# EAGLE board ACmaster (EAGLE 6.4)
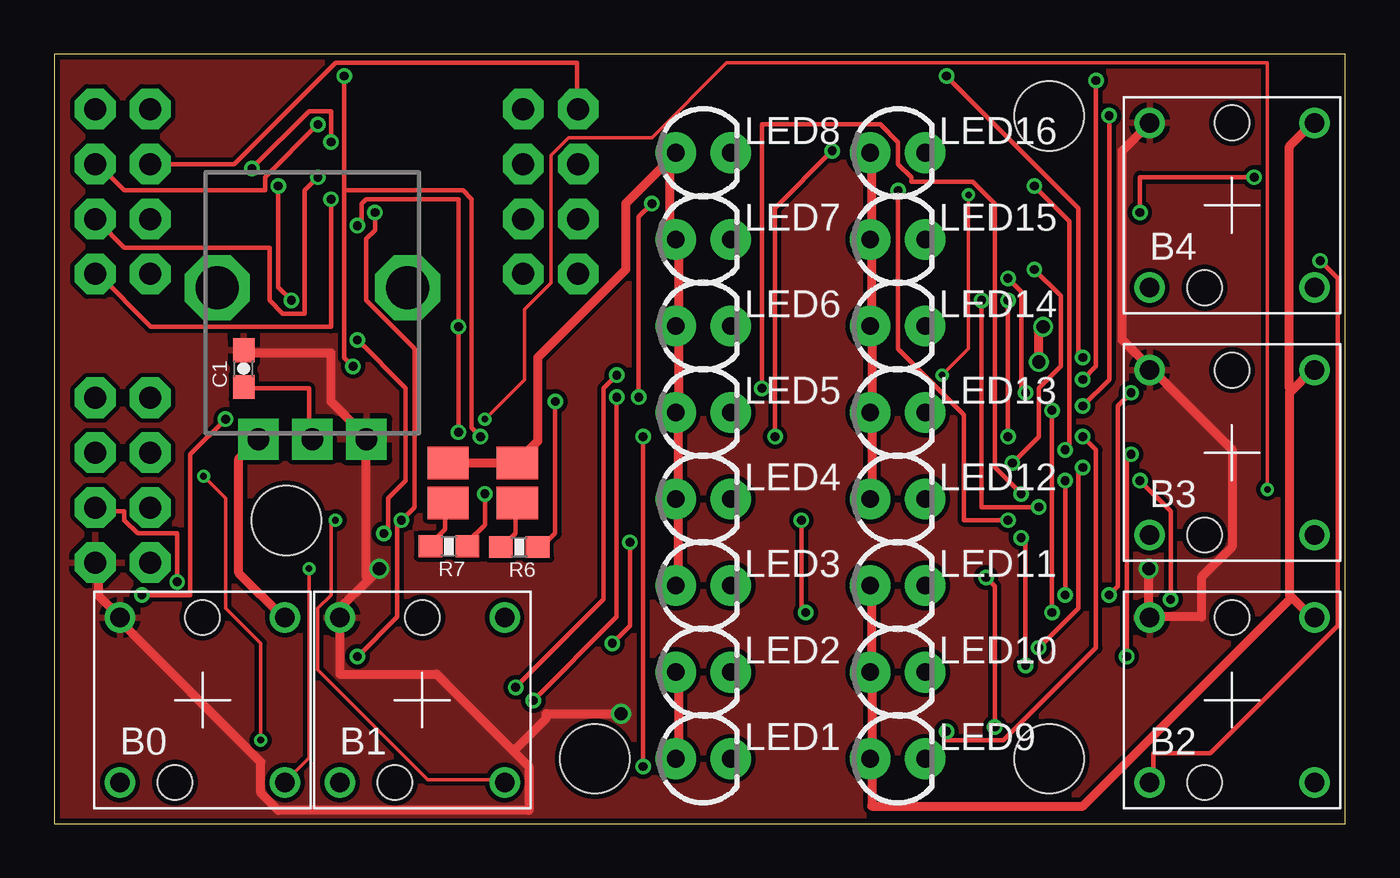
[diagram p0: board, top side]
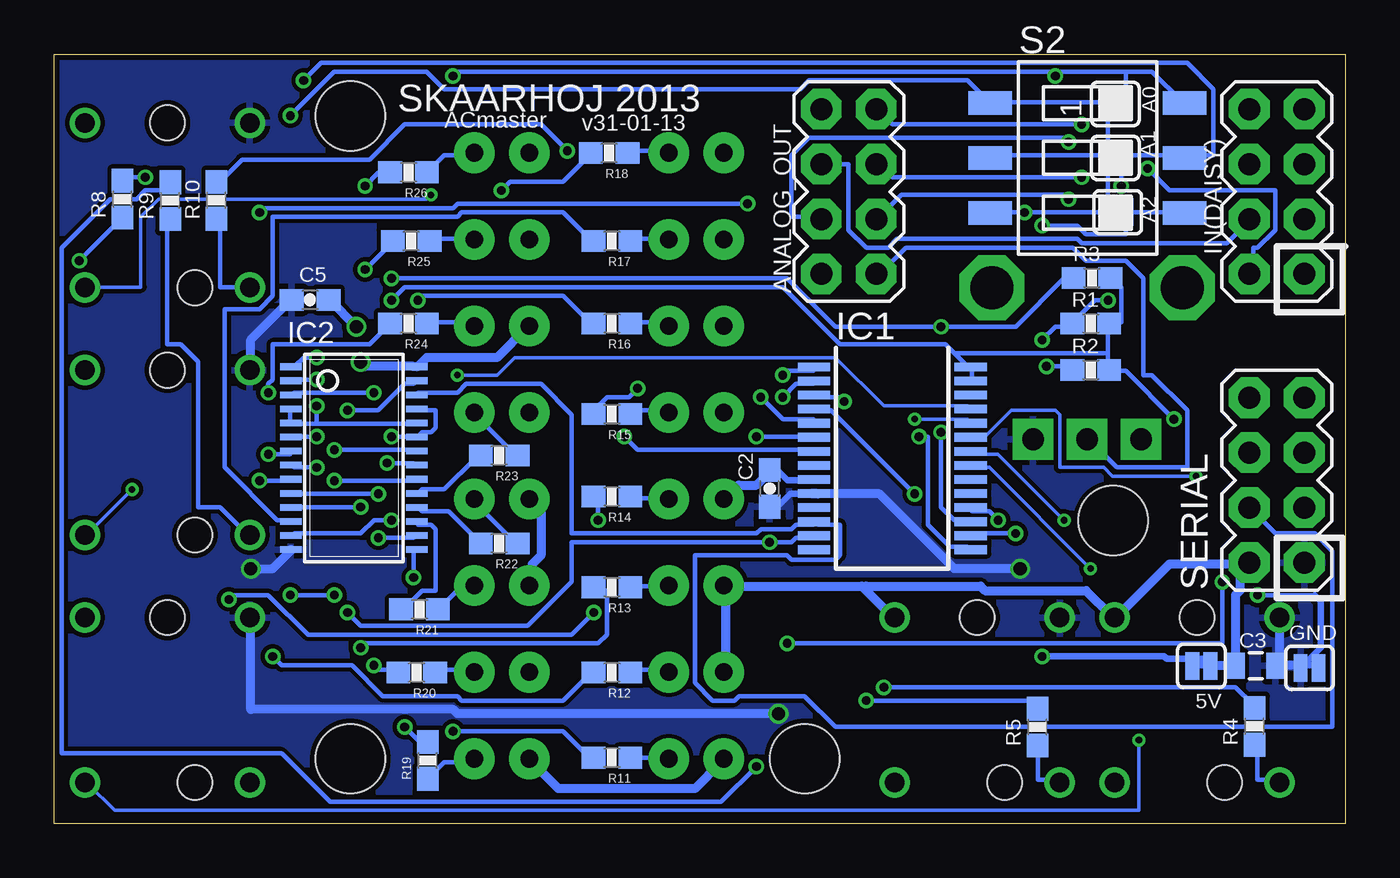
[diagram p1: board, bottom side, seen from below]

Size 59.69 x 35.56 mm. Coordinates in mm from the lower left corner, seen from the top.
Outline: 0,0 59.69,0 59.69,35.56 0,35.56 0,0
Copper layers (1*16): Top 0.035mm / dielectric 1.5mm / Bottom 0.035mm
Design rules "Fusion_eagle_rule_v1.1": minimum track width 6mil, minimum drill 12mil, track to track 6mil, track to pad 6mil, pad to pad 6mil, via to via 6mil, smd to smd 0mil, copper to edge 10mil, drill to drill 10mil, minimum pad ring 10mil, minimum via ring 6mil, stop-mask expansion 2mil, vias tented up to drill 100mil, thermal gap 10mil
Net classes: 0 default: width 0.203 mm, drill 0.406 mm, clearance 0.152 mm; 1 Power: width 0.406 mm, drill 0.61 mm, clearance 0.203 mm; 2 Signal: width 0.152 mm, clearance 0.152 mm
Holes 3.2 mm at 10.73,14 25,3 46,32.7 46,3

## Footprints (pad centres in the part's own frame; a part is rotated, then mirrored left to right if it is on the bottom)
SJ_2S = smd 0.635 x 1.27: 1 -0.412,0; 2 0.412,0
2X4 = drill 1.016 pad 1.88 octagon: 1 -3.81,-1.27; 2 -3.81,1.27; 3 -1.27,-1.27; 4 -1.27,1.27; 5 1.27,-1.27; 6 1.27,1.27; 7 3.81,-1.27; 8 3.81,1.27
CFPB-6/9MM = drill 0.9: P$1 -3.81,3.81; P$2 3.81,-3.81; P$3 3.81,3.81; P$4 -3.81,-3.81 | hole 1.6: 0,3.81; -1.27,-3.81
0603-CAP = smd 1.1 x 1: 1 -0.85,0; 2 0.85,0
0805 = smd 0.8 x 1.2: 1 -0.9,0; 2 0.9,0
SSOP28 = smd 0.4 x 1.5: 1 -4.225,-3.625; 2 -3.575,-3.625; 3 -2.925,-3.625; 4 -2.275,-3.625; 5 -1.625,-3.625; 6 -0.975,-3.625; 7 -0.325,-3.625; 8 0.325,-3.625; 9 0.975,-3.625; 10 1.625,-3.625; 11 2.275,-3.625; 12 2.925,-3.625; 13 3.575,-3.625; 14 4.225,-3.625; 15 4.225,3.625; 16 3.575,3.625; 17 2.925,3.625; 18 2.275,3.625; 19 1.625,3.625; 20 0.975,3.625; 21 0.325,3.625; 22 -0.325,3.625; 23 -0.975,3.625; 24 -1.625,3.625; 25 -2.275,3.625; 26 -2.925,3.625; 27 -3.575,3.625; 28 -4.225,3.625
TSSOP28 = smd 0.305 x 0.991: 1 -4.225,-2.918; 2 -3.575,-2.918; 3 -2.925,-2.918; 4 -2.275,-2.918; 5 -1.625,-2.918; 6 -0.975,-2.918; 7 -0.325,-2.918; 8 0.325,-2.918; 9 0.975,-2.918; 10 1.625,-2.918; 11 2.275,-2.918; 12 2.925,-2.918; 13 3.575,-2.918; 14 4.225,-2.918; 15 4.225,2.918; 16 3.575,2.918; 17 2.925,2.918; 18 2.275,2.918; 19 1.625,2.918; 20 0.975,2.918; 21 0.325,2.918; 22 -0.325,2.918; 23 -0.975,2.918; 24 -1.625,2.918; 25 -2.275,2.918; 26 -2.925,2.918; 27 -3.575,2.918; 28 -4.225,2.918
LED3MM = drill 0.813 pad 1.88: A -1.27,0; K 1.27,0
0603-RES = smd 1.1 x 1: 1 -0.85,0; 2 0.85,0
SMS-003 = smd 1.092 x 2.007: 1 -2.54,-4.496; 2 0,-4.496; 3 2.54,-4.496; 4 2.54,4.496; 5 0,4.496; 6 -2.54,4.496
ALPS_POT = drill 1 pad 1.88 square: P$1 7,-2.5; P$2 7,0; P$3 7,2.5 | drill 2 octagon: P$4 0,-4.4; P$5 0,4.4
LEDBICOLOR-SMD = smd 1.9 x 1.5: P$1 1.6,0.925; P$2 -1.6,0.925; P$3 1.6,-0.925; P$4 -1.6,-0.925

## Placement (x,y rotation side)
5V  SOLDERJUMPERNC  [SJ_2S]  6.66,7.29 180 bottom
A0  SOLDERJUMPERNC  [SJ_2S]  10.63,33.25 0 bottom
A1  SOLDERJUMPERNC  [SJ_2S]  10.63,30.76 0 bottom
A2  SOLDERJUMPERNC  [SJ_2S]  10.52,28.25 0 bottom
ANALOG_OUT  M04X2  [2X4]  22.95,29.21 90 bottom
B0  CFPB  [CFPB-6/9MM]  6.86,5.71 0 top
B1  CFPB  [CFPB-6/9MM]  17.02,5.71 0 top
B2  CFPB  [CFPB-6/9MM]  54.45,5.71 0 top
B3  CFPB  [CFPB-6/9MM]  54.45,17.14 0 top
B4  CFPB  [CFPB-6/9MM]  54.45,28.57 0 top
C1  10nF  [0603-CAP]  8.77,21.03 90 top
C2  100nF  [0603-CAP]  26.61,15.49 90 bottom
C3  10uF  [0805]  4.15,7.29 0 bottom
C5  100nF  [0603-CAP]  47.85,24.2 180 bottom
GND  SOLDERJUMPERNC  [SJ_2S]  1.66,7.2 0 bottom
IC1  MCP23017SS  [SSOP28]  20.94,16.88 270 bottom
IC2  PCA9685  [TSSOP28]  45.83,16.89 270 bottom
IN(DAISY)  M04X2  [2X4]  3.17,29.21 90 bottom
LED1  [LED3MM]  30,3 0 top
LED2  [LED3MM]  30,7 0 top
LED3  [LED3MM]  30,11 0 top
LED4  [LED3MM]  30,15 0 top
LED5  [LED3MM]  30,19 0 top
LED6  [LED3MM]  30,23 0 top
LED7  [LED3MM]  30,27 0 top
LED8  [LED3MM]  30,31 0 top
LED9  [LED3MM]  39,3 0 top
LED10  [LED3MM]  39,7 0 top
LED11  [LED3MM]  39,11 0 top
LED12  [LED3MM]  39,15 0 top
LED13  [LED3MM]  39,19 0 top
LED14  [LED3MM]  39,23 0 top
LED15  [LED3MM]  39,27 0 top
LED16  [LED3MM]  39,31 0 top
R1  10K  [0603-RES]  11.78,23.1 0 bottom
R2  10K  [0603-RES]  11.78,20.96 0 bottom
R3  10K  [0603-RES]  11.71,25.21 0 bottom
R4  [0603-RES]  4.2,4.5 90 bottom
R5  [0603-RES]  14.23,4.47 90 bottom
R6  [0603-RES]  21.5,12.79 0 top
R7  [0603-RES]  18.25,12.82 0 top
R8  [0603-RES]  56.52,28.86 90 bottom
R9  [0603-RES]  54.31,28.79 90 bottom
R10  [0603-RES]  52.18,28.8 90 bottom
R11  [0603-RES]  33.91,3.05 180 bottom
R12  [0603-RES]  33.91,6.99 180 bottom
R13  [0603-RES]  33.91,10.92 180 bottom
R14  [0603-RES]  33.91,15.11 180 bottom
R15  [0603-RES]  33.91,18.92 180 bottom
R16  [0603-RES]  33.91,23.11 180 bottom
R17  [0603-RES]  33.91,26.92 180 bottom
R18  [0603-RES]  34.04,30.99 180 bottom
R19  [0603-RES]  42.42,2.92 90 bottom
R20  [0603-RES]  42.93,6.99 180 bottom
R21  [0603-RES]  42.8,9.91 180 bottom
R22  [0603-RES]  39.12,12.95 180 bottom
R23  [0603-RES]  39.12,17.02 180 bottom
R24  [0603-RES]  43.31,23.11 180 bottom
R25  [0603-RES]  43.18,26.92 180 bottom
R26  [0603-RES]  43.31,30.1 180 bottom
S2  SWS003  [SMS-003]  11.93,30.76 270 bottom
SERIAL  M04X2  [2X4]  3.17,15.88 90 bottom
U$2  [ALPS_POT]  11.94,24.77 270 top
U$6  LEDBICOLOR-SMD  [LEDBICOLOR-SMD]  19.81,15.75 0 top

## Library data of the parts
5V A0 A1 A2 ANALOG_OUT C1-C3 C5 GND IN(DAISY) LED1-LED16 R1-R26 SERIAL U$2 = SparkFun
B0 B1-B4 U$6 = SKAARHOJ
IC1 = microchip; MF: MICROCHIP; MPN: MCP23017-E/SS; OC_FARNELL: 1467674; OC_NEWARK: 31K2960
IC2 = wsmith
S2 = smd-special

## Nets
5V [Power]: 5V.1 B0.P$3 B1.P$3 B2.P$3 B3.P$3 B4.P$3 C2.2 C3.1 C5.1 IC1.9 IC2.28 LED1.A LED2.A LED3.A LED4.A LED5.A LED6.A LED7.A LED8.A LED9.A LED10.A LED11.A LED12.A LED13.A LED14.A LED15.A LED16.A SERIAL.2 U$2.P$1 U$6.P$1 U$6.P$2
5VL: 5V.2 A0.1 A1.1 A2.1 IC1.18 IC2.4 IC2.5 IC2.24 S2.1 S2.2 S2.3
A0: A0.2 IC1.15 IC2.1 R2.1 S2.6
A1: A1.2 IC1.16 IC2.2 R1.1 S2.5
A2: A2.2 IC1.17 IC2.3 R3.1 S2.4
ANALOG1: ANALOG_OUT.1 C1.1 U$2.P$2
ANALOG2: ANALOG_OUT.2
GND [Power]: B0.P$1 B1.P$1 B2.P$1 B3.P$1 B4.P$1 C1.2 C2.1 C3.2 C5.2 GND.1 IC1.10 IC2.14 SERIAL.1 U$2.P$3
GNDL: GND.2 IC1.27 IC1.28 IC2.23 IC2.25 R1.2 R2.2 R3.2
GPA0 [Signal]: B0.P$2 IC1.21
GPA1 [Signal]: B1.P$2 IC1.22
GPA2 [Signal]: B2.P$2 IC1.23
GPA3 [Signal]: B3.P$2 IC1.24
GPA4 [Signal]: B4.P$2 IC1.25
GPA5 [Signal]: IC1.26
I2C_SCL: IC1.12 IC2.26 SERIAL.4
I2C_SDA: IC1.13 IC2.27 SERIAL.3
L0: LED1.K R11.1
L1: LED2.K R12.1
L2: LED3.K R13.1
L3: LED4.K R14.1
L4: LED5.K R15.1
L5: LED6.K R16.1
L6: LED7.K R17.1
L7: LED8.K R18.1
L8: LED9.K R19.1
L9: LED10.K R20.1
L10: LED11.K R21.1
L11: LED12.K R22.1
L12: LED13.K R23.1
L13: LED14.K R24.1
L14: LED15.K R25.1
L15: LED16.K R26.1
LC0: B0.P$4 R4.1
LC1: B1.P$4 R5.1
LC2: R6.1 U$6.P$3
LC3: R7.1 U$6.P$4
LC4: B2.P$4 R8.1
LC5: B3.P$4 R9.1
LC6: B4.P$4 R10.1
N$1: IC2.13 R18.2
N$2: IC1.4 R7.2
N$3: IC1.5 R8.2
N$4: IC1.6 R9.2
N$5: IC1.7 R10.2
N$7: IC1.3 R6.2
N$8: IC1.2 R5.2
N$9: IC1.1 R4.2
N$10: ANALOG_OUT.3 IN(DAISY).1
N$11: ANALOG_OUT.5 IN(DAISY).3
N$12: ANALOG_OUT.7 IN(DAISY).5
N$13: ANALOG_OUT.4 IN(DAISY).2
N$14: ANALOG_OUT.6 IN(DAISY).4
N$15: ANALOG_OUT.8 IN(DAISY).6
N$16: IC2.12 R17.2
N$17: IC2.11 R16.2
N$18: IC2.10 R15.2
N$19: IC2.9 R14.2
N$20: IC2.8 R13.2
N$21: IC2.7 R12.2
N$22: IC2.6 R11.2
N$23: IC2.15 R19.2
N$24: IC2.16 R20.2
N$25: IC2.17 R21.2
N$26: IC2.18 R22.2
N$27: IC2.19 R23.2
N$28: IC2.20 R24.2
N$29: IC2.21 R25.2
N$30: IC2.22 R26.2

## Tracks (layer width: path | path; a pad name or v marks a point on that pad's centre or on a via)
5V  (via drill 0.61)
  Top 0.406: 57.2,10.46 57.1,10.57 57.1,19.91 57.2,20.02 | 57.2,10.46 58.12,9.55 B2.P$3 | 57.2,20.02 58.12,20.93 B3.P$3 | B4.P$3 58.12,32.31 57.1,31.29 57.1,20.12 57.2,20.02 | LED11.A 37.8,10.97 37.8,7.11 LED10.A 37.8,6.91 37.8,3.05 LED9.A 37.8,2.85 37.8,0.81 47.55,0.81 57.2,10.46 | LED12.A 37.8,15.04 37.8,18.9 LED13.A 37.8,19.1 37.8,22.96 LED14.A 37.8,23.16 37.8,26.82 LED15.A 37.8,27.03 37.8,30.89 LED16.A | v45.72,22.96 45.52,22.76 v45.52,21.34 | U$6.P$2 18.29,16.66 21.34,16.66 U$6.P$1 21.54,16.87 22.35,17.68 22.35,21.54 26.42,25.6 26.42,28.65 28.65,30.89 LED8.A 28.45,30.48 28.45,27.23 28.65,27.03 LED7.A 28.85,26.82 28.85,23.16 LED6.A 28.85,22.96 28.85,19.1 LED5.A 28.85,18.9 28.85,15.04 LED4.A 28.85,14.83 28.85,11.18 LED3.A | U$2.P$1 9.35,17.68 8.53,16.87 8.53,11.58 10.57,9.55 B0.P$3 | LED1.A 28.85,3.05 28.85,6.91 LED2.A
  Bottom 0.305: C2.2 26.25,16.34 25.78,15.88 24.59,15.88 IC1.9
  Bottom 0.406: LED14.A 37.8,22.96 39.22,21.54 42.47,21.54 42.88,21.13 IC2.28 43.08,21.13 45.31,21.13 v45.52,21.34 | v45.72,22.96 46.94,24.18 C5.1 | LED11.A 37.59,11.18 37.59,11.99 37.19,12.39 37.19,14.83 37.59,14.83 LED12.A | 5V.1 6.1,7.32 5.08,7.32 C3.1 5.08,7.52 5.08,10.57 4.88,10.77 4.88,11.99 | 4.88,11.99 4.47,11.99 SERIAL.2 4.88,11.99 | 4.88,11.99 8.13,11.99 10.57,9.55 B0.P$3 10.77,9.55 11.99,10.77 16.66,10.77 16.87,10.97 22.15,10.97 22.25,10.87 | C2.2 26.62,16.26 27.23,15.65 28.04,15.65 28.65,15.04 LED4.A | 22.25,10.87 22.35,10.97 28.65,10.97 LED3.A 28.65,10.77 28.65,7.11 LED2.A | 22.25,10.87 20.93,9.55 B1.P$3 | LED9.A 37.59,2.85 36.37,1.63 30.07,1.63 28.85,2.85 LED1.A
5VL  (via drill 0.41)
  Top 0.203: v14.02,7.72 15.85,9.55 15.85,13.82 v16.05,14.02 16.66,14.63 16.66,21.95 14.43,24.18 14.43,27.03 14.83,27.43 v14.83,28.25 | v47.55,19.3 48.77,20.52 v48.77,32.72
  Bottom 0.203: v16.05,14.02 16.46,14.43 17.27,14.43 IC1.18 | 7.11,7.32 5V.2 | 47.55,18.49 48.56,18.49 IC2.5 48.77,18.49 48.77,19.1 IC2.4 | 47.55,18.49 43.08,18.49 IC2.24 | A1.1 10.97,30.68 10.97,28.45 A2.1 10.97,28.25 v14.83,28.25 16.26,28.25 S2.3 | A1.1 10.97,30.89 10.97,33.12 A0.1 11.18,33.33 16.26,33.33 S2.1 16.46,33.33 17.48,34.34 24.79,34.34 25.2,33.93 41.66,33.93 42.47,34.75 46.74,34.75 v48.77,32.72 | S2.2 16.26,30.89 11.18,30.89 A1.1 | v47.55,19.3 47.55,18.49
  Bottom 0.305: 7.11,7.32 6.53,7.32 6.22,7.62 8.26,7.62 8.38,7.75 13.99,7.75 v14.02,7.72
A0  (via drill 0.41)
  Top 0.203: v47.55,21.54 47.35,21.74 47.35,28.45 v41.25,34.54 | v13.82,21.13 13.41,21.54 13.41,29.26 | v13.41,34.54 13.41,29.26 | v19.71,17.88 19.3,18.29 19.3,28.85 18.9,29.26 13.41,29.26
  Bottom 0.203: v47.55,21.54 48.16,21.54 48.56,21.13 IC2.1 | v41.25,34.54 41.05,34.75 13.41,34.75 | 10.16,34.75 8.94,34.75 7.52,33.33 S2.6 | 10.16,34.75 13.41,34.75 | v13.82,21.13 12.8,21.13 R2.1 | 13.41,34.75 v13.41,34.54 | 10.16,34.75 10.16,33.33 A0.2 | v19.71,17.88 19.3,17.88 19.3,13.82 18.29,12.8 17.48,12.8 IC1.15
A1  (via drill 0.41)
  Top 0.203: v10.97,24.18 10.36,24.79 v10.36,29.46 | v15.24,13.41 15.44,13.61 15.44,15.04 16.26,15.85 16.26,20.12 v14.02,22.35 | v47.55,20.52 48.16,21.13 v48.16,34.34
  Bottom 0.203: v10.97,24.18 11.58,24.18 12.6,23.16 R1.1 12.8,22.96 13.41,22.96 v14.02,22.35 | v10.36,29.46 10.36,30.68 A1.2 10.16,30.89 7.52,30.89 S2.5 7.32,30.89 6.1,30.89 6.1,33.93 7.32,35.15 47.35,35.15 v48.16,34.34 | v15.24,13.41 17.27,13.41 IC1.16 | v47.55,20.52 48.56,20.52 IC2.2
A2  (via drill 0.41)
  Top 0.203: v44.91,19.91 44.7,20.12 44.7,24.59 v44.09,25.2 | v18.69,18.09 v18.69,22.96 18.69,28.85 14.43,28.85 14.22,28.65 14.22,27.84 v14.02,27.64
  Bottom 0.203: S2.4 7.52,28.25 9.96,28.25 A2.2 10.16,28.25 10.16,27.23 11.99,27.23 12.39,27.64 v14.02,27.64 | v44.91,19.91 48.56,19.91 IC2.3 | v44.09,25.2 25.81,25.2 23.57,22.96 v18.69,22.96 15.24,22.96 13.01,25.2 12.6,25.2 R3.1 | v18.69,18.09 18.69,14.63 18.09,14.02 17.48,14.02 IC1.17
ANALOG1
  Top 0.203: C1.1 8.94,20.12 11.79,20.12 11.79,17.88 U$2.P$2
  Bottom 0.203: ANALOG_OUT.1 21.54,25.4 20.32,26.62 12.6,26.62 11.99,26.01 10.16,26.01 9.35,25.2 9.35,20.73 8.94,20.73 7.32,19.1 7.32,16.46 10.57,16.46 11.79,17.68 U$2.P$2
GND  (via drill 0.61)
  Top 0.406: v50.6,11.79 50.6,9.55 B2.P$1 50.8,9.55 53.03,9.55 53.03,11.38 54.46,12.8 54.46,17.27 50.8,20.93 B3.P$1 50.6,21.13 49.38,22.35 49.38,31.09 50.6,32.31 B4.P$1 | C1.2 8.94,21.74 12.8,21.74 12.8,19.51 14.43,17.88 U$2.P$3 14.43,17.68 14.43,11.38 14.53,11.28 | SERIAL.1 2.03,11.99 2.03,10.57 3.05,9.55 B0.P$1 3.05,9.35 9.55,2.85 9.55,1.42 10.36,0.61 21.95,0.61 21.95,2.64 21.23,3.35 | 14.53,11.28 13.21,9.96 B1.P$1 13.21,6.91 17.68,6.91 21.23,3.35 | 14.53,11.28 v15.04,11.79 | v26.21,5.08 22.76,5.08 22.76,4.88 21.23,3.35
  Bottom 0.305: C2.1 26.25,14.64 25.65,15.24 IC1.10
  Bottom 0.406: v50.6,11.79 49.58,11.79 48.77,12.6 IC2.14 | C5.2 48.77,24.18 50.6,22.35 50.6,21.13 B3.P$1 | GND.1 2.23,7.32 3.05,7.32 C3.2 3.05,7.52 B0.P$1 | v15.04,11.79 18.09,11.79 21.54,15.24 24.38,15.24 IC1.10 | v26.21,5.08 41.05,5.08 41.25,5.28 50.6,5.28 50.6,9.35 B2.P$1
  pour Bottom: 0,0 59.69,0 59.69,35.56 0,35.56
  pour Top: 0,0 59.69,0 59.69,35.56 0,35.56
GNDL  (via drill 0.41)
  Top 0.203: v4.06,10.57 6.3,10.57 6.3,17.07 v7.92,18.69 | v44.09,24.18 v44.09,17.88
  Bottom 0.203: 10.97,21.74 10.97,22.96 R1.2 10.77,23.16 10.36,23.16 10.36,24.79 10.77,25.2 R3.2 | 10.97,21.74 10.97,21.13 R2.2 10.77,20.93 10.16,20.93 v7.92,18.69 | v4.06,10.57 1.42,10.57 | 1.42,7.32 GND.2 | IC2.25 42.88,19.1 42.06,19.1 42.06,18.29 42.27,18.09 42.67,18.09 42.88,17.88 IC2.23 43.08,17.88 v44.09,17.88 | v44.09,24.18 43.48,24.79 26.01,24.79 23.37,22.15 18.49,22.15 18.09,21.74 | 18.09,21.74 17.48,21.13 IC1.28 17.27,20.93 17.27,20.52 IC1.27 | 18.09,21.74 10.97,21.74
  Bottom 0.305: 1.42,7.32 1.96,7.32 | 1.96,7.32 2.03,7.24 | 1.96,7.32 1.14,8.13 1.14,10.29 1.42,10.57
GPA0  (via drill 0.3)
  Top 0.152: v11.79,11.79 11.79,3.05 10.77,2.03 B0.P$2
  Bottom 0.152: v11.79,11.79 16.46,16.46 17.27,16.46 IC1.21
GPA1  (via drill 0.3)
  Top 0.152: v13.01,14.02 12.8,13.82 12.8,10.57 12.19,9.96 12.19,7.11 17.27,2.03 20.73,2.03 B1.P$2
  Bottom 0.152: v13.01,14.02 16.05,17.07 17.27,17.07 IC1.22
GPA2  (via drill 0.3)
  Top 0.152: v6.91,16.05 7.92,15.04 7.92,9.96 9.55,8.33 v9.55,3.86
  Bottom 0.152: v6.91,16.05 10.77,16.05 11.18,16.46 13.21,16.46 13.21,18.9 13.41,19.1 15.44,19.1 16.66,17.88 17.27,17.88 IC1.23 | v9.55,3.86 9.55,0.61 56.9,0.61 58.12,1.83 B2.P$2
GPA3  (via drill 0.3)
  Top 0.152: v19.91,18.69 21.74,20.52 21.74,23.77 22.96,24.99 22.96,30.89 23.77,31.7 27.64,31.7 31.09,35.15 56.08,35.15 v56.08,15.44
  Bottom 0.152: v19.91,18.69 17.48,18.69 IC1.24 | v56.08,15.44 58.12,13.41 B3.P$2
GPA4  (via drill 0.3)
  Top 0.152: v41.05,20.73 42.27,21.95 v42.27,29.06
  Bottom 0.152: v41.05,20.73 39.22,20.73 38.41,21.54 23.57,21.54 21.34,19.3 17.48,19.3 IC1.25 | v42.27,29.06 42.47,28.85 54.86,28.85 55.68,28.04 55.68,24.79 58.12,24.79 B4.P$2
I2C_SCL
  Bottom 0.203: IC2.26 42.88,19.91 41.05,19.91 40.64,20.32 37.19,20.32 35.76,18.9 35.76,13.41 27.23,13.41 27.03,13.61 25.6,13.61 25.4,13.82 24.59,13.82 IC1.12 24.38,13.82 23.37,13.82 23.37,12.39 23.57,12.19 25.6,12.19 25.81,12.39 30.07,12.39 30.07,6.5 29.26,5.69 28.25,5.69 28.04,5.89 24.99,5.89 23.57,4.47 0.61,4.47 0.61,12.6 1.42,13.41 3.25,13.41 SERIAL.4
I2C_SDA  (via drill 0.41)
  Top 0.203: v46.13,9.75 v46.13,19.1 | v5.69,11.18 5.69,13.41 3.86,13.41 3.25,14.02 3.25,14.43 2.03,14.43 SERIAL.3 | v25.81,8.33 26.62,9.14 v26.62,13.01
  Bottom 0.203: v46.13,19.1 44.7,19.1 43.48,20.32 43.08,20.32 IC2.27 | v46.13,9.75 45.52,9.14 37.8,9.14 35.76,11.18 35.76,13.01 v26.62,13.01 25.6,13.01 25.4,13.21 24.59,13.21 IC1.13 | v5.69,11.18 5.69,8.33 v25.81,8.33
L0
  Bottom 0.203: R11.1 31.29,3.05 LED1.K
L1
  Bottom 0.203: R12.1 32.92,7.11 31.29,7.11 LED2.K
L2
  Bottom 0.203: R13.1 32.92,10.97 31.29,10.97 LED3.K
L3
  Bottom 0.203: R14.1 32.92,15.04 31.29,15.04 LED4.K
L4
  Bottom 0.203: R15.1 32.92,19.1 31.29,19.1 LED5.K
L5
  Bottom 0.203: R16.1 32.92,23.16 31.29,23.16 LED6.K
L6
  Bottom 0.203: R17.1 32.92,27.03 31.29,27.03 LED7.K
L7
  Bottom 0.203: R18.1 33.12,31.09 31.29,31.09 LED8.K
L8
  Bottom 0.203: R19.1 42.27,2.23 41.66,2.85 40.44,2.85 LED9.K
L9
  Bottom 0.203: R20.1 42.06,7.11 40.44,7.11 LED10.K
L10
  Bottom 0.203: R21.1 41.86,9.96 40.84,10.97 40.44,10.97 LED11.K
L11
  Bottom 0.203: R22.1 38.41,13.01 40.23,14.83 LED12.K
L12
  Bottom 0.203: R23.1 38.41,17.07 40.23,18.9 LED13.K
L13
  Bottom 0.203: R24.1 42.27,23.16 40.44,23.16 LED14.K
L14
  Bottom 0.203: R25.1 42.27,27.03 40.44,27.03 LED15.K
L15
  Bottom 0.203: R26.1 42.27,30.28 41.66,30.89 40.44,30.89 LED16.K
LC0
  Bottom 0.203: R4.1 4.06,3.45 4.06,2.03 3.05,2.03 B0.P$4
LC1
  Bottom 0.203: R5.1 14.22,3.45 14.22,2.03 13.21,2.03 B1.P$4
LC2
  Top 0.203: R6.1 20.73,12.8 21.34,13.41 21.34,14.63 U$6.P$3
LC3
  Top 0.203: R7.1 17.48,13.01 18.09,13.61 18.09,14.63 U$6.P$4
LC4  (via drill 0.41)
  Top 0.203: v58.52,26.01 59.33,25.2 59.33,9.14 53.44,3.25 50.8,3.25 50.8,2.03 B2.P$4
  Bottom 0.203: v58.52,26.01 56.69,27.84 R8.1
LC5
  Bottom 0.203: R9.1 54.46,27.84 54.46,22.15 53.85,22.15 53.03,21.34 53.03,14.63 52.02,14.63 50.8,13.41 B3.P$4
LC6
  Bottom 0.203: R10.1 52.02,27.84 52.02,24.79 50.8,24.79 B4.P$4
N$1  (via drill 0.41)
  Top 0.203: v44.09,14.02 42.06,14.02 42.06,18.9 39.01,21.95 v39.01,29.26
  Bottom 0.203: v44.09,14.02 44.91,14.02 45.52,13.41 48.56,13.41 IC2.13 | v39.01,29.26 38.61,29.67 36.17,29.67 34.95,30.89 R18.2
N$2  (via drill 0.41)
  Top 0.203: v19.91,15.24 19.91,13.82 19.1,13.01 R7.2
  Bottom 0.203: v19.91,15.24 23.77,19.1 24.38,19.1 IC1.4
N$3  (via drill 0.41)
  Top 0.203: v55.47,29.87 50.19,29.87 v50.19,28.25 | v27.64,28.65 27.03,28.04 v27.03,19.71
  Bottom 0.203: v55.47,29.87 56.49,29.87 R8.2 | v50.19,28.25 49.99,28.45 41.25,28.45 41.05,28.65 v27.64,28.65 | v27.03,19.71 26.01,18.69 24.59,18.69 IC1.5
N$4  (via drill 0.41)
  Top 0.203: v27.23,17.88 v27.23,2.64
  Bottom 0.203: v27.23,2.64 28.85,1.02 46.94,1.02 49.17,3.25 59.33,3.25 59.33,26.62 57.1,28.85 55.88,28.85 55.47,29.26 54.66,29.26 54.46,29.46 R9.2 | v27.23,17.88 24.59,17.88 IC1.6
N$5  (via drill 0.41)
  Top 0.203: v35.97,31.09 33.33,28.45 v33.33,17.88
  Bottom 0.203: v35.97,31.09 37.19,32.31 43.48,32.31 45.11,30.68 51,30.68 52.02,29.67 R10.2 | v33.33,17.88 32.72,17.27 24.59,17.27 IC1.7
N$7  (via drill 0.41)
  Top 0.203: v23.16,19.51 23.16,13.41 22.55,12.8 R6.2
  Bottom 0.203: v23.16,19.51 23.37,19.71 24.38,19.71 IC1.3
N$8  (via drill 0.41)
  Top 0.203: v22.15,5.69 26.01,9.55 v26.01,19.71
  Bottom 0.203: v22.15,5.69 14.63,5.69 14.43,5.49 R5.2 | v26.01,19.71 25.4,20.32 24.59,20.32 IC1.2
N$9  (via drill 0.41)
  Top 0.203: v21.34,6.3 25.4,10.36 25.4,20.12 v26.01,20.73
  Bottom 0.203: v21.34,6.3 5.08,6.3 4.27,5.49 R4.2 | v26.01,20.73 25.81,20.93 24.59,20.93 IC1.1
N$10  (via drill 0.41)
  Top 0.203: v12.8,28.85 12.8,22.96 4.47,22.96 2.03,25.4 IN(DAISY).1
  Bottom 0.203: v12.8,28.85 13.01,29.06 20.52,29.06 21.54,28.04 ANALOG_OUT.3
N$11  (via drill 0.41)
  Top 0.203: v12.19,29.87 11.58,29.26 11.58,23.57 10.57,23.57 9.96,24.18 9.96,26.62 3.25,26.62 2.03,27.84 IN(DAISY).3
  Bottom 0.203: v12.19,29.87 20.93,29.87 21.54,30.48 ANALOG_OUT.5
N$12  (via drill 0.41)
  Top 0.203: v12.19,32.31 9.75,29.87 9.75,29.26 3.25,29.26 2.03,30.48 IN(DAISY).5
  Bottom 0.203: v12.19,32.31 20.93,32.31 21.54,32.92 ANALOG_OUT.7
N$13  (via drill 0.41)
  Top 0.203: v9.14,30.28 11.79,32.92 12.8,32.92 v12.8,31.5
  Bottom 0.203: v9.14,30.28 8.13,29.26 3.25,29.26 3.25,27.43 4.06,26.62 4.27,26.62 4.27,25.4 IN(DAISY).2 | v12.8,31.5 13.01,31.7 24.79,31.7 25.6,30.89 25.6,28.04 24.38,28.04 ANALOG_OUT.4
N$14
  Bottom 0.203: ANALOG_OUT.6 22.96,30.48 22.96,27.43 22.15,26.62 21.13,26.62 20.73,27.03 12.39,27.03 12.19,26.82 5.49,26.82 4.47,27.84 IN(DAISY).4
N$15
  Top 0.203: IN(DAISY).6 8.33,30.48 13.01,35.15 24.18,35.15 24.18,33.12 ANALOG_OUT.8
N$16
  Bottom 0.203: IC2.12 48.77,14.02 49.38,14.02 51.82,16.46 51.82,23.77 50.19,23.77 49.58,24.38 49.58,28.04 41.05,28.04 40.84,28.25 36.17,28.25 34.95,27.03 R17.2
N$17  (via drill 0.41)
  Top 0.203: v45.52,14.63 42.88,14.63 v42.88,24.18
  Bottom 0.203: v45.52,14.63 48.56,14.63 IC2.11 | v42.88,24.18 42.67,24.38 36.17,24.38 34.95,23.16 R16.2
N$18  (via drill 0.41)
  Top 0.203: v44.7,15.24 43.48,16.46 43.48,28.65 42.47,29.67 39.62,29.67 39.62,29.87 39.01,30.48 39.01,31.5 38.2,32.31 32.72,32.31 v32.72,20.12
  Bottom 0.203: v44.7,15.24 48.56,15.24 IC2.10 | v32.72,20.12 33.12,19.71 34.14,19.71 34.75,19.1 R15.2
N$19  (via drill 0.41)
  Top 0.203: v50.19,15.85 51.61,14.43 v51.61,10.36 | v34.75,9.75 34.54,9.96 v34.54,14.02
  Bottom 0.203: v50.19,15.85 48.77,15.85 IC2.9 | v51.61,10.36 51.41,10.57 49.78,10.57 47.95,8.74 35.76,8.74 v34.75,9.75 | v34.54,14.02 34.54,15.04 34.75,15.04 R14.2
N$20  (via drill 0.41)
  Top 0.203: v47.55,16.46 47.35,16.26 47.35,9.96 v45.52,8.13
  Bottom 0.203: v47.55,16.46 48.56,16.46 IC2.8 | v45.52,8.13 45.31,8.33 34.54,8.33 34.14,8.74 34.14,10.77 34.75,10.77 R13.2
N$21  (via drill 0.41)
  Top 0.203: v49.78,17.07 49.58,16.87 v49.58,7.72
  Bottom 0.203: v49.78,17.07 48.77,17.07 IC2.7 | v49.58,7.72 49.17,7.32 45.92,7.32 44.5,5.89 41.05,5.89 40.84,5.69 36.17,5.69 34.95,6.91 R12.2
N$22  (via drill 0.41)
  Top 0.203: v47.55,17.88 48.16,17.27 48.16,8.13 43.89,3.86 41.25,3.86 v41.25,4.27
  Bottom 0.203: v47.55,17.88 48.56,17.88 IC2.6 | v41.25,4.27 36.17,4.27 34.95,3.05 R11.2
N$23  (via drill 0.41)
  Top 0.203: v43.08,11.38 43.48,10.97 v43.48,4.47
  Bottom 0.203: v43.08,11.38 43.08,12.6 IC2.15 | v43.48,4.47 42.88,3.86 42.47,3.86 R19.2
N$24  (via drill 0.41)
  Top 0.203: v44.7,13.21 44.91,13.01 v44.91,7.32
  Bottom 0.203: v44.7,13.21 43.08,13.21 IC2.16 | v44.91,7.32 44.7,7.11 43.89,7.11 R20.2
N$25
  Bottom 0.203: IC2.17 42.88,13.82 42.27,13.82 42.06,13.61 42.06,10.77 42.67,10.77 43.48,9.96 R21.2
N$26
  Bottom 0.203: IC2.18 42.88,14.63 42.67,14.43 41.45,14.43 40.03,13.01 R22.2
N$27
  Bottom 0.203: IC2.19 42.88,15.24 42.67,15.44 41.66,15.44 40.23,16.87 40.03,16.87 R23.2
N$28  (via drill 0.41)
  Top 0.203: v46.74,10.57 v46.74,15.85 | v48.77,10.57 49.17,10.97 49.17,19.3 v49.78,19.91
  Bottom 0.203: v46.74,15.85 43.08,15.85 IC2.20 | v48.77,10.57 v46.74,10.57 | v49.78,19.91 49.78,20.32 49.58,20.52 49.58,22.15 45.11,22.15 44.3,22.96 R24.2
N$29  (via drill 0.41)
  Top 0.203: v44.3,16.66 45.52,17.88 45.52,20.12 46.53,21.13 46.53,24.38 v45.31,25.6
  Bottom 0.203: v44.3,16.66 43.08,16.66 IC2.21 | v45.31,25.6 44.09,26.82 R25.2
N$30  (via drill 0.41)
  Top 0.203: v46.74,17.27 46.94,17.48 46.94,27.84 v45.31,29.46
  Bottom 0.203: v46.74,17.27 43.08,17.27 IC2.22 | v45.31,29.46 44.7,30.07 44.3,30.07 R26.2

## Text on the board
_bsilk: SKAARHOJ 2013 | v31-01-13 | ACmaster